# Allegro board core.brd
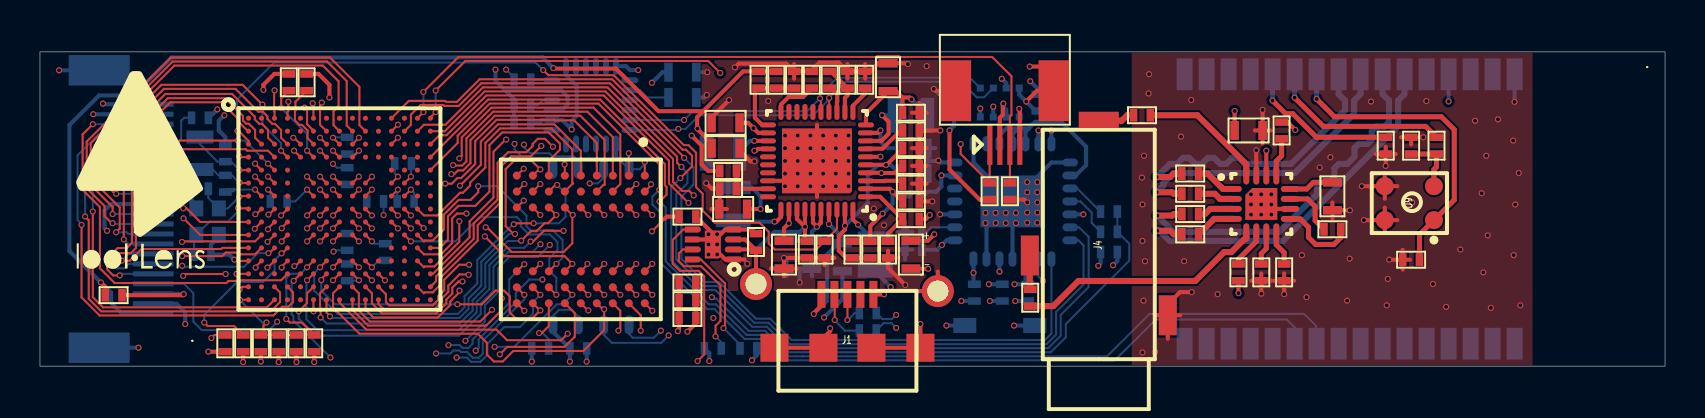
[diagram p0: board, top side]
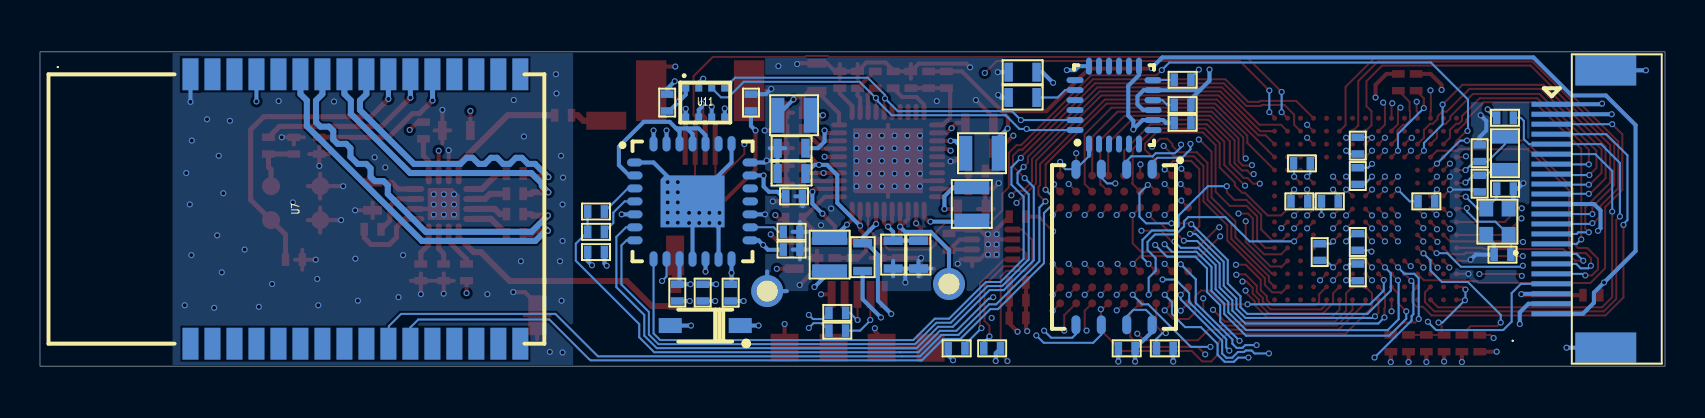
[diagram p1: board, bottom side, seen from below]

Outline 81.28 x 15.75 mm; copper layers: TOP, GND, SIG1, SIG2, POWER, BOTTOM. Coordinates in mm from the lower left corner of the outline.
Outline path: 0,15.75 81.28,15.75 81.28,0 0,0 0,15.75

## Design rules (mm)
net group 2.5V: nets N93770 N94238
net group INL+: nets INL+ N234325
net group INL-: nets INL- N234317
net group INR+: nets INR+ N234321
net group INR-: nets INR- N234313
net group MICP: nets MICP N234231
net group N108220: nets N108220 N209430
net group N108232: nets N108232 N209434
net group N233329: nets N233329 N237100
net group N234021: nets N234021 N234029
net group N234184: nets N76608 N234184
net group OSC32-IN: nets OSC32-IN OSC32-OUT
net group OUTL: nets N2332311 OUTL
net group OUTR: nets N2332490 OUTR
net group 5V: nets N92103
net group POWER: nets N87122
net group RAM_CTL: nets N192988 N192990 N192992 N192994 N192996 N192998 N193000 N193002 N193004

## Placement (name value [footprint] x y rotation side)
C1  1uF  [0402]  12.83 1.14 90 top
C2  0.1uF  [0402]  11.94 1.14 90 top
C3  20pF  [0402]  8.13 5.59 0 bottom
C4  20pF  [0402]  8 8.89 180 bottom
C5  12pF  [0402]  9.27 9.14 90 bottom
C6  12pF  [0402]  9.27 10.67 90 bottom
C7  0.1uF  [0402]  18.16 10.16 0 bottom
C8  0.1uF  [0402]  17.27 5.71 270 bottom
C9  0.1uF  [0402]  18.29 8.26 0 bottom
C10  0.1uF  [0402]  15.37 11.05 90 bottom
C11  0.1uF  [0402]  15.37 4.7 270 bottom
C12  0.1uF  [0402]  11.94 8.26 180 bottom
C13  0.1uF  [0402]  15.37 6.22 270 bottom
C14  0.1uF  [0402]  16.76 8.26 0 bottom
C15  4.7uF  [0603]  32.13 13.46 0 bottom
C16  0.1uF  [0402]  24.13 12.19 0 bottom
C17  4.7uF  [0603]  32.13 14.73 0 bottom
C18  0.1uF  [0402]  24.13 13.08 0 bottom
C19  4.7uF  [0603]  38.61 5.59 270 bottom
C20  4.7pF  [0402]  40.64 5.84 270 top
C21  4.7uF  [0603]  43.69 9.65 180 bottom
C22  4.7uF  [0603]  37.21 5.59 270 top
C23  4.7uF  [0603]  34.67 7.87 0 top
C24  4.7uF  [0603]  34.29 12.19 180 top
C25  0.1uF  [0402]  38.61 14.35 270 top
C26  33pF  [0402]  36.83 14.35 90 top
C27  4.7uF  [0603]  34.29 10.92 180 top
C28  1uF  [0402]  43.56 10.92 180 top
C29  4.7uF  [0603]  43.69 10.92 0 bottom
C30  4.7uF  [0603]  42.42 14.48 270 top
C31  2.2uF  [0603]  40.13 5.46 270 bottom
C32  4.7uF  [0603]  37.34 5.59 270 bottom
C33  1uF  [0402]  38.35 5.84 90 top
C34  0.1uF  [0402]  39.24 5.84 270 top
C35  1uF  [0402]  43.56 9.14 0 top
C36  0.1uF  [0402]  35.81 6.22 90 top
C37  0.1uF  [0402]  42.42 5.84 90 top
C38  0.1uF  [0402]  43.56 11.81 180 top
C39  0.1uF  [0402]  26.92 0.89 180 bottom
C40  0.1uF  [0402]  32.38 7.49 180 top
C41  0.1uF  [0402]  32.38 3.3 180 top
C42  0.1uF  [0402]  32.38 2.41 180 top
C43  0.1uF  [0402]  32.38 4.19 180 top
C46  0.1uF  [0402]  15.37 9.53 90 bottom
C47  2.2uF  [0603]  60.45 11.81 0 top
C48  470nF  [0402]  57.53 9.65 0 top
C49  2.2uF  [0603]  64.64 8.51 90 top
C50  470nF  [0402]  57.53 8.64 0 top
C51  470nF  [0402]  57.53 7.62 0 top
C52  470nF  [0402]  57.53 6.6 0 top
C53  1uF  [0402]  64.64 6.86 180 top
C54  470nF  [0402]  69.85 11.05 270 top
C55  0.1uF  [0402]  68.58 5.33 180 top
C56  470nF  [0402]  67.31 11.05 270 top
C57  1uF  [0402]  62.23 4.7 270 top
C58  1uF  [0402]  43.69 6.73 180 bottom
C59  1uF  [0402]  49.91 13.21 90 bottom
C60  0.1uF  [0402]  45.72 13.21 270 bottom
C61  1uF  [0402]  46.74 3.68 90 bottom
C62  10nF  [0402]  43.56 8.51 0 bottom
C63  1uF  [0402]  53.47 5.71 180 bottom
C64  10nF  [0402]  49.4 3.68 90 bottom
C65  1uF  [0402]  48.13 3.68 90 bottom
C66  10nF  [0402]  43.69 5.84 0 bottom
D1  LED  [0603]  43.56 5.59 90 top
D2  CMMSH1-40  [SOD123]  48.01 2.03 0 bottom
F1  -  [FPC-22]  5.66 13.12 270 bottom
F2  -  [FPC-4]  47.51 11.1 0 top
J1  -  [MICRO-USB]  40.39 0.92 0 top
J4  PHONEJACK STEREO  [PHONEJACK-3P]  52.96 0.35 90 top
J5  HEADER 1  [H-1]  35.81 4.11 0 top
J6  HEADER 1  [H-1]  44.91 3.76 0 top
L1  100nH  [0402]  11.05 1.14 90 top
L2  2.2uH  [0806]  41.78 5.59 270 bottom
L3  2.2uH  [0806]  34.67 8.13 90 bottom
L4  2.2uH  [0806]  34.16 10.67 180 bottom
L5  2.2uH  [0806]  43.56 12.57 0 bottom
M1  MTG  [MTG-100]  7.62 1.27 0 top
M2  MTG  [MTG-100]  80.39 14.99 0 top
NOREF  -  []  1.28 4.29 0 top
NOREF#2  -  []  0 0 0 top
NOREF#3  -  []  0 0 90 top
O1  25M  [OSC-2016]  8.38 7.24 0 bottom
O2  32.768K  [OSC-2012]  8 10.67 90 bottom
R1  10K  [0402]  35.43 0.89 180 bottom
R2  10K  [0402]  33.66 0.89 0 bottom
R3  10K  [0402]  12.45 14.22 270 top
R4  10K  [0402]  13.72 1.14 90 top
R5  10K  [0402]  13.34 14.22 270 top
R6  10K  [0402]  9.27 1.14 270 top
R7  10K  [0402]  10.16 1.14 90 top
R8  10K  [0402]  47.5 8.76 270 top
R9  10K  [0402]  48.51 8.76 270 top
R10  1K  [0402]  24.13 14.35 180 bottom
R11  160K  [0402]  41.53 5.84 270 top
R12  30K  [0402]  43.56 8.26 0 top
R13  470K  [0402]  34.42 9.78 180 top
R14  150K  [0402]  34.42 8.89 180 top
R15  470K  [0402]  35.94 14.35 90 top
R16  220K  [0402]  37.72 14.35 90 top
R17  22  [0402]  41.4 1.78 0 bottom
R18  22  [0402]  41.4 2.67 0 bottom
R19  10  [0402]  43.56 10.03 180 top
R20  220K  [0402]  43.56 12.7 0 top
R22  1.5K  [0402]  41.27 14.35 270 top
R23  100K  [0402]  40.39 14.35 90 top
R24  100K  [0402]  39.5 14.35 90 top
R25  10K  [0402]  43.56 7.37 0 top
R26  10K  [0402]  8 12.45 0 bottom
R27  10K  [0402]  3.68 3.56 180 top
R28  10K  [0402]  25.02 0.89 0 bottom
R29  10K  [0402]  62.1 11.81 270 top
R30  16  [0402]  49.53 3.43 90 top
R31  16  [0402]  55.12 12.57 180 top
R32  3.3K  [0402]  68.58 11.05 90 top
R33  10K  [0402]  59.94 4.7 270 top
R34  10K  [0402]  61.09 4.7 270 top
R35  0  [0402]  53.47 7.75 180 bottom
R36  NC  [0402]  53.47 6.73 180 bottom
U1  STM32F429  [STM32F429-UFBGA176]  14.98 7.87 0 top
U2  MPU6050  [MPU6050-QFN]  27.56 13.08 90 bottom
U3  RT5002  [RT5002-QFN40]  38.86 10.29 180 top
U4  MAX17048  [MAX17048-TDFN8]  33.66 6.1 180 top
U5  MT48LC8M16A2  [MT48LC8M16A2-VFBGA54]  27.05 6.35 270 top
U6  W25Q256  [W25Q256-SON]  27.56 5.97 270 bottom
U7  -  [BK8000L-MODULE]  56.05 1.12 90 bottom
U8  TPA6132A2  [TPA6132A2-QFN]  61.09 8.13 0 top
U9  -  [SPU0410HR5H-PB]  69.72 9.02 270 top
U10  ADBS-A320  [ADBS-A320-QFN]  48.64 8.26 180 bottom
U11  BMP280  [BMP280-LGA8]  48.01 13.21 90 bottom

## Library data of the parts
C1 C28 C33 C35 C53 C57-C59 C61 C63 C65 = Cap: signal model: DEFAULT_CAPACITOR_1e+06pF_2_1
C2 C7-C14 C16 C18 C25 C34 C36-C43 C46 C55 C60 = Cap: signal model: DEFAULT_CAPACITOR_100000pF_2_1
C3 C4 = Cap: signal model: DEFAULT_CAPACITOR_20.000000pF_2_1
C5 C6 = Cap: signal model: DEFAULT_CAPACITOR_12.000000pF_2_1
C15 C17 C19 C21-C24 C27 C29 C30 C32 = Cap: signal model: DEFAULT_CAPACITOR_4.7e+06pF_2_1
C20 = Cap: signal model: DEFAULT_CAPACITOR_4.700000pF_2_1
C26 = Cap: signal model: DEFAULT_CAPACITOR_33.000000pF_2_1
C31 C47 C49 = Cap: signal model: DEFAULT_CAPACITOR_2.2e+06pF_2_1
C48 C50-C52 C54 C56 = Cap: signal model: DEFAULT_CAPACITOR_470000pF_2_1
C62 C64 C66 = Cap: signal model: DEFAULT_CAPACITOR_10000pF_2_1
D1 = LED
D2 = 1n5819
F1 = FPC-22
F2 = FPC-4
J1 = MICRO-USB
J4 = PHONEJACK STEREO
J5 J6 = HEADER 1
L1 = Inductor: signal model: DEFAULT_INDUCTOR_100.000000nH_2_1
L2-L5 = Inductor: signal model: DEFAULT_INDUCTOR_2200nH_2_1
M1 M2 = MTG
O1 = OSC-N
O2 = OSC-CLK: signal model: DEFAULT_RESISTOR_32768OHM_2_1
R1-R9 R25-R29 R33 R34 = Res: signal model: DEFAULT_RESISTOR_10000OHM_2_1
R10 = Res: signal model: DEFAULT_RESISTOR_1000.000000OHM_2_1
R11 = Res: signal model: DEFAULT_RESISTOR_160000OHM_2_1
R12 = Res: signal model: DEFAULT_RESISTOR_30000OHM_2_1
R13 R15 = Res: signal model: DEFAULT_RESISTOR_470000OHM_2_1
R14 = Res: signal model: DEFAULT_RESISTOR_150000OHM_2_1
R16 R20 = Res: signal model: DEFAULT_RESISTOR_220000OHM_2_1
R17 R18 = Res: signal model: DEFAULT_RESISTOR_22.000000OHM_2_1
R19 = Res: signal model: DEFAULT_RESISTOR_10.000000OHM_2_1
R22 = Res: signal model: DEFAULT_RESISTOR_1500OHM_2_1
R23 R24 = Res: signal model: DEFAULT_RESISTOR_100000OHM_2_1
R30 R31 = Res: signal model: DEFAULT_RESISTOR_16.000000OHM_2_1
R32 = Res: signal model: DEFAULT_RESISTOR_3300OHM_2_1
R35 = Res: signal model: DEFAULT_RESISTOR_0.001OHM_2_1
R36 = Res
U1 = STM32F429
U2 = MPU6050
U3 = RT5002
U4 = MAX17048
U5 = MT48LC8M16A2
U6 = W25Q256
U7 = BK8000L-MODULE
U8 = TPA6132A2
U9 = SPU0410HR5H-PB
U10 = ADBS-A320_1
U11 = BMP280_0

## Footprints (pads in the part's own frame, mm; a bottom-side part is the same pattern mirrored in y, then rotated)
0402
  rect 0.375x0.64 smd: 1(-0.42,0) 2(0.42,0)
0603
  rect 0.425x0.95 smd: 1(-0.7,0) 2(0.7,0)
0806
  rect 0.675x1.75 smd: 1(-0.825,0) 2(0.825,0)
ADBS-A320-QFN
  oval 0.775x0.4 smd: 1(-2.887,1.95) 2(-2.887,1.3) 3(-2.887,0.65) 4(-2.887,0) 5(-2.887,-0.65) 6(-2.887,-1.3) 7(-2.887,-1.95) 15(2.887,-1.95) 16(2.887,-1.3) 17(2.887,-0.65) 18(2.887,0) 19(2.887,0.65) 20(2.887,1.3) 21(2.887,1.95)
  oval 0.4x0.775 smd: 8(-1.95,-2.887) 9(-1.3,-2.887) 10(-0.65,-2.887) 11(0,-2.887) 12(0.65,-2.887) 13(1.3,-2.887) 14(1.95,-2.887) 22(1.95,2.887) 23(1.3,2.887) 24(0.65,2.887) 25(0,2.887) 26(-0.65,2.887) 27(-1.3,2.887) 28(-1.95,2.887)
  custom 3.2x2.6 smd: 29(0,0)
BK8000L-MODULE
  rect 1.6x0.8 smd: 1(0,17.7) 2(0,16.6) 3(0,15.5) 4(0,14.4) 5(0,13.3) 6(0,12.2) 7(0,11.1) 8(0,10) 9(0,8.9) 10(0,7.8) 11(0,6.7) 12(0,5.6) 13(0,4.5) 14(0,3.4) 15(0,2.3) 16(0,1.2) 17(13.5,1.2) 18(13.5,2.3) 19(13.5,3.4) 20(13.5,4.5) 21(13.5,5.6) 22(13.5,6.7) 23(13.5,7.8) 24(13.5,8.9) 25(13.5,10) 26(13.5,11.1) 27(13.5,12.2) 28(13.5,13.3) 29(13.5,14.4) 30(13.5,15.5) 31(13.5,16.6) 32(13.5,17.7)
BMP280-LGA8
  rect 0.35x0.35 smd: 1(0.725,0.975) 2(0.725,0.325) 3(0.725,-0.325) 4(0.725,-0.975) 5(-0.725,-0.975) 6(-0.725,-0.325) 7(-0.725,0.325) 8(-0.725,0.975)
FPC-4
  rect 0.254x2.032 smd: 1(0,0) 2(0.5,0) 3(1,0) 4(1.5,0)
  rect 1.524x3.048 smd: 5(-1.7,2.7) 6(3.2,2.7)
FPC-22
  rect 0.254x2.032 smd: 1(0,0) 2(0.5,0) 3(1,0) 4(1.5,0) 5(2,0) 6(2.5,0) 7(3,0) 8(3.5,0) 9(4,0) 10(4.5,0) 11(5,0) 12(5.5,0) 13(6,0) 14(6.5,0) 15(7,0) 16(7.5,0) 17(8,0) 18(8.5,0) 19(9,0) 20(9.5,0) 21(10,0) 22(10.5,0)
  rect 1.524x3.048 smd: 23(-1.7,2.7) 24(12.2,2.7)
H-1
  round 1.6 hole 1.05: 1(0,0)
MAX17048-TDFN8
  custom 0.8x0.3 smd: 1(-1,0.75) 2(-1,0.25) 3(-1,-0.25) 4(-1,-0.75) 5(1,-0.75) 6(1,-0.25) 7(1,0.25) 8(1,0.75)
  custom 0.8x1.4 smd: 9(0,0)
MICRO-USB
  round 0.01 hole 0.5 unplated: (-2,2.15) (2,2.15)
  rect 0.4x1.35 smd: 1(-1.3,2.675) 2(-0.65,2.675) 3(0,2.675) 4(0.65,2.675) 5(1.3,2.675)
  rect 1.4x1.4 smd: 6(-3.65,0) 7(-1.2,0) 8(1.2,0) 9(3.65,0)
MPU6050-QFN
  oval 0.85x0.3 smd: 1(-1.95,1.25) 2(-1.95,0.75) 3(-1.95,0.25) 4(-1.95,-0.25) 5(-1.95,-0.75) 6(-1.95,-1.25) 13(1.95,-1.25) 14(1.95,-0.75) 15(1.95,-0.25) 16(1.95,0.25) 17(1.95,0.75) 18(1.95,1.25)
  oval 0.3x0.85 smd: 7(-1.25,-1.95) 8(-0.75,-1.95) 9(-0.25,-1.95) 10(0.25,-1.95) 11(0.75,-1.95) 12(1.25,-1.95) 19(1.25,1.95) 20(0.75,1.95) 21(0.25,1.95) 22(-0.25,1.95) 23(-0.75,1.95) 24(-1.25,1.95)
MT48LC8M16A2-VFBGA54
  round 0.4 smd: A1(-3.2,3.2) A2(-2.4,3.2) A3(-1.6,3.2) A7(1.6,3.2) A8(2.4,3.2) A9(3.2,3.2) B1(-3.2,2.4) B2(-2.4,2.4) B3(-1.6,2.4) B7(1.6,2.4) B8(2.4,2.4) B9(3.2,2.4) C1(-3.2,1.6) C2(-2.4,1.6) C3(-1.6,1.6) C7(1.6,1.6) C8(2.4,1.6) C9(3.2,1.6) D1(-3.2,0.8) D2(-2.4,0.8) D3(-1.6,0.8) D7(1.6,0.8) D8(2.4,0.8) D9(3.2,0.8) E1(-3.2,0) E2(-2.4,0) E3(-1.6,0) E7(1.6,0) E8(2.4,0) E9(3.2,0) F1(-3.2,-0.8) F2(-2.4,-0.8) F3(-1.6,-0.8) F7(1.6,-0.8) F8(2.4,-0.8) F9(3.2,-0.8) G1(-3.2,-1.6) G2(-2.4,-1.6) G3(-1.6,-1.6) G7(1.6,-1.6) G8(2.4,-1.6) G9(3.2,-1.6) H1(-3.2,-2.4) H2(-2.4,-2.4) H3(-1.6,-2.4) H7(1.6,-2.4) H8(2.4,-2.4) H9(3.2,-2.4) J1(-3.2,-3.2) J2(-2.4,-3.2) J3(-1.6,-3.2) J7(1.6,-3.2) J8(2.4,-3.2) J9(3.2,-3.2)
MTG-100
  round 0.1 hole 1 unplated: (0,0)
OSC-2012
  rect 0.65x1.35 smd: 1(-0.812,0) 2(0.812,0)
OSC-2016
  rect 0.7x0.8 smd: 1(-0.563,0.663) 2(-0.563,-0.663) 3(0.563,-0.663) 4(0.563,0.663)
PHONEJACK-3P
  round 0.01 hole 1.4 unplated: (1.7,0) (8.7,0)
  rect 2x0.9 smd: 1(5.2,3.45) 3(2.2,-3.45)
  rect 0.9x2 smd: 2(11.95,0)
RT5002-QFN40
  oval 0.8x0.25 smd: 1(-2.45,1.8) 2(-2.45,1.4) 3(-2.45,1) 4(-2.45,0.6) 5(-2.45,0.2) 6(-2.45,-0.2) 7(-2.45,-0.6) 8(-2.45,-1) 9(-2.45,-1.4) 10(-2.45,-1.8) 21(2.45,-1.8) 22(2.45,-1.4) 23(2.45,-1) 24(2.45,-0.6) 25(2.45,-0.2) 26(2.45,0.2) 27(2.45,0.6) 28(2.45,1) 29(2.45,1.4) 30(2.45,1.8)
  oval 0.25x0.8 smd: 11(-1.8,-2.45) 12(-1.4,-2.45) 13(-1,-2.45) 14(-0.6,-2.45) 15(-0.2,-2.45) 16(0.2,-2.45) 17(0.6,-2.45) 18(1,-2.45) 19(1.4,-2.45) 20(1.8,-2.45) 31(1.8,2.45) 32(1.4,2.45) 33(1,2.45) 34(0.6,2.45) 35(0.2,2.45) 36(-0.2,2.45) 37(-0.6,2.45) 38(-1,2.45) 39(-1.4,2.45) 40(-1.8,2.45)
  custom 3.5x3.25 smd: 41(0,0)
SOD123
  rect 1.15x0.75 smd: 1(-1.75,0) 2(1.75,0)
SPU0410HR5H-PB
  round 0.9 smd: 1(1.7,0) 2(1.7,-2.46) 3(0,-2.46) 4(0,0)
STM32F429-UFBGA176
  round 0.25 smd: A1(-4.55,4.55) A2(-3.9,4.55) A3(-3.25,4.55) A4(-2.6,4.55) A5(-1.95,4.55) A6(-1.3,4.55) A7(-0.65,4.55) A8(0,4.55) A9(0.65,4.55) A10(1.3,4.55) A11(1.95,4.55) A12(2.6,4.55) A13(3.25,4.55) A14(3.9,4.55) A15(4.55,4.55) B1(-4.55,3.9) B2(-3.9,3.9) B3(-3.25,3.9) B4(-2.6,3.9) B5(-1.95,3.9) B6(-1.3,3.9) B7(-0.65,3.9) B8(0,3.9) B9(0.65,3.9) B10(1.3,3.9) B11(1.95,3.9) B12(2.6,3.9) B13(3.25,3.9) B14(3.9,3.9) B15(4.55,3.9) C1(-4.55,3.25) C2(-3.9,3.25) C3(-3.25,3.25) C4(-2.6,3.25) C5(-1.95,3.25) C6(-1.3,3.25) C7(-0.65,3.25) C8(0,3.25) C9(0.65,3.25) C10(1.3,3.25) C11(1.95,3.25) C12(2.6,3.25) C13(3.25,3.25) C14(3.9,3.25) C15(4.55,3.25) D1(-4.55,2.6) D2(-3.9,2.6) D3(-3.25,2.6) D4(-2.6,2.6) D5(-1.95,2.6) D6(-1.3,2.6) D7(-0.65,2.6) D8(0,2.6) D9(0.65,2.6) D10(1.3,2.6) D11(1.95,2.6) D12(2.6,2.6) D13(3.25,2.6) D14(3.9,2.6) D15(4.55,2.6) E1(-4.55,1.95) E2(-3.9,1.95) E3(-3.25,1.95) E4(-2.6,1.95) E12(2.6,1.95) E13(3.25,1.95) E14(3.9,1.95) E15(4.55,1.95) F1(-4.55,1.3) F2(-3.9,1.3) F3(-3.25,1.3) F4(-2.6,1.3) F6(-1.3,1.3) F7(-0.65,1.3) F8(0,1.3) F9(0.65,1.3) F10(1.3,1.3) F12(2.6,1.3) F13(3.25,1.3) F14(3.9,1.3) F15(4.55,1.3) G1(-4.55,0.65) G2(-3.9,0.65) G3(-3.25,0.65) G4(-2.6,0.65) G6(-1.3,0.65) G7(-0.65,0.65) G8(0,0.65) G9(0.65,0.65) G10(1.3,0.65) G12(2.6,0.65) G13(3.25,0.65) G14(3.9,0.65) G15(4.55,0.65) H1(-4.55,0) H2(-3.9,0) H3(-3.25,0) H4(-2.6,0) H6(-1.3,0) H7(-0.65,0) H8(0,0) H9(0.65,0) H10(1.3,0) H12(2.6,0) H13(3.25,0) H14(3.9,0) H15(4.55,0) J1(-4.55,-0.65) J2(-3.9,-0.65) J3(-3.25,-0.65) J4(-2.6,-0.65) J6(-1.3,-0.65) J7(-0.65,-0.65) J8(0,-0.65) J9(0.65,-0.65) J10(1.3,-0.65) J12(2.6,-0.65) J13(3.25,-0.65) J14(3.9,-0.65) J15(4.55,-0.65) K1(-4.55,-1.3) K2(-3.9,-1.3) K3(-3.25,-1.3) K4(-2.6,-1.3) K6(-1.3,-1.3) K7(-0.65,-1.3) K8(0,-1.3) K9(0.65,-1.3) K10(1.3,-1.3) K12(2.6,-1.3) K13(3.25,-1.3) K14(3.9,-1.3) K15(4.55,-1.3) L1(-4.55,-1.95) L2(-3.9,-1.95) L3(-3.25,-1.95) L4(-2.6,-1.95) L12(2.6,-1.95) L13(3.25,-1.95) L14(3.9,-1.95) L15(4.55,-1.95) M1(-4.55,-2.6) M2(-3.9,-2.6) M3(-3.25,-2.6) M4(-2.6,-2.6) M5(-1.95,-2.6) M6(-1.3,-2.6) M7(-0.65,-2.6) M8(0,-2.6) M9(0.65,-2.6) M10(1.3,-2.6) M11(1.95,-2.6) M12(2.6,-2.6) M13(3.25,-2.6) M14(3.9,-2.6) M15(4.55,-2.6) N1(-4.55,-3.25) N2(-3.9,-3.25) N3(-3.25,-3.25) N4(-2.6,-3.25) N5(-1.95,-3.25) N6(-1.3,-3.25) N7(-0.65,-3.25) N8(0,-3.25) N9(0.65,-3.25) N10(1.3,-3.25) N11(1.95,-3.25) N12(2.6,-3.25) N13(3.25,-3.25) N14(3.9,-3.25) N15(4.55,-3.25) P1(-4.55,-3.9) P2(-3.9,-3.9) P3(-3.25,-3.9) P4(-2.6,-3.9) P5(-1.95,-3.9) P6(-1.3,-3.9) P7(-0.65,-3.9) P8(0,-3.9) P9(0.65,-3.9) P10(1.3,-3.9) P11(1.95,-3.9) P12(2.6,-3.9) P13(3.25,-3.9) P14(3.9,-3.9) P15(4.55,-3.9) R1(-4.55,-4.55) R2(-3.9,-4.55) R3(-3.25,-4.55) R4(-2.6,-4.55) R5(-1.95,-4.55) R6(-1.3,-4.55) R7(-0.65,-4.55) R8(0,-4.55) R9(0.65,-4.55) R10(1.3,-4.55) R11(1.95,-4.55) R12(2.6,-4.55) R13(3.25,-4.55) R14(3.9,-4.55) R15(4.55,-4.55)
TPA6132A2-QFN
  oval 0.925x0.3 smd: 1(-1.437,0.75) 2(-1.437,0.25) 3(-1.437,-0.25) 4(-1.437,-0.75) 9(1.437,-0.75) 10(1.437,-0.25) 11(1.437,0.25) 12(1.437,0.75)
  oval 0.3x0.925 smd: 5(-0.75,-1.437) 6(-0.25,-1.437) 7(0.25,-1.437) 8(0.75,-1.437) 13(0.75,1.437) 14(0.25,1.437) 15(-0.25,1.437) 16(-0.75,1.437)
  custom 1.6x1.6 smd: 17(0,0)
W25Q256-SON
  oval 0.95x0.45 smd: 1(-3.9,1.905) 2(-3.9,0.635) 3(-3.9,-0.635) 4(-3.9,-1.905) 5(3.9,-1.905) 6(3.9,-0.635) 7(3.9,0.635) 8(3.9,1.905)

## Nets
2.5V: C26.2 C27.2 F1.22 L4.2 R15.2 R27.2
3.3V: C9.2 C10.2 C11.2 C12.2 C13.2 C14.2 C16.2 C17.1 C23.2 C39.2 C40.2 C41.2 C42.2 C43.2 C46.2 C47.1 C59.2 C60.2 D2.2 F2.4 L1.1 L3.2 R1.1 R2.1 R5.1 R6.2 R8.2 R13.2 R25.2 R26.2 R28.1 R29.1 R33.2 U1.C5(VDD1) U1.C7(VDD2) U1.C8(VDD3) U1.C9(VDD4) U1.F3(VDD5) U1.G3(VDD6) U1.G13(VDD7) U1.H13(VDD8) U1.J12(VDD9) U1.J13(VDD10) U1.K4(VDD11) U1.N8(VDD12) U1.N9(VDD13) U1.N10(VDD14) U2.8(VLOGIC) U2.13(VDD) U5.A7(VDDQ1) U5.A9(VDD1) U5.B3(VDDQ2) U5.C7(VDDQ3) U5.D3(VDDQ4) U5.E7(VDD2) U5.J9(VDD3) U6.3(W\P\) U6.7(R\S\T\) U6.8(VCC) U7.29(VBAT) U8.14(VDD) U11.2(CSB) U11.6(VDDIO) U11.8(VDD)
3V: C61.2 C62.2 C63.2 C64.2 C65.2 C66.2 D2.1 U10.5(VDDIO1) U10.10(NRST) U10.12(ORIENT) U10.14(VDDIO2) U10.15(IO_SELECT) U10.20(VDDA) U10.27(LED+)
5V: C20.2 C21.2 C28.2 F1.1 F1.11 R11.2 U3.5(PVD7) U3.39(PVD1)
GND: C1.1 C2.1 C3.2 C4.2 C5.1 C6.2 C7.1 C8.1 C9.1 C10.1 C11.1 C12.1 C13.1 C14.1 C15.2 C16.1 C17.2 C18.1 C19.2 C21.1 C22.2 C23.1 C24.2 C25.1 C27.1 C28.1 C29.2 C30.1 C31.2 C32.2 C33.1 C34.2 C35.2 C36.2 C37.1 C38.1 C39.1 C40.1 C41.1 C42.1 C43.1 C46.1 C47.2 C49.1 C55.2 C56.2 C57.2 C58.2 C59.1 C60.1 C61.1 C62.1 C63.1 C64.1 C65.1 C66.1 F1.2 F1.21 F1.23 F1.24 F2.2 F2.5 F2.6 J1.5(GND) J1.6(SH1) J1.7(SH2) J1.8(SH3) J1.9(SH4) J4.3(C) J6.1 O1.2(GND1) O1.4(GND2) R3.1 R4.1 R7.1 R9.2 R12.2 R14.2 R16.2 R19.1 R20.2 R22.1 R23.2 R32.2 R34.2 U1.D5(VSS1) U1.D7(VSS2) U1.D8(VSS3) U1.D9(VSS4) U1.F2(VSS5) U1.F6(VSS6) U1.F7(VSS7) U1.F8(VSS8) U1.F9(VSS9) U1.F10(VSS10) U1.F12(VSS11) U1.G2(VSS12) U1.G6(VSS13) U1.G7(VSS14) U1.G8(VSS15) U1.G9(VSS16) U1.G10(VSS17) U1.G12(VSS18) U1.H6(VSS19) U1.H7(VSS20) U1.H8(VSS21) U1.H9(VSS22) U1.H10(VSS23) U1.H12(VSS24) U1.J6(VSS25) U1.J7(VSS26) U1.J8(VSS27) U1.J9(VSS28) U1.J10(VSS29) U1.K6(VSS30) U1.K7(VSS31) U1.K8(VSS32) U1.K9(VSS33) U1.K10(VSS34) U1.M1(VSSA) U1.M8(VSS35) U1.M9(VSS36) U1.N1(VREF-) U2.1(CLKIN) U2.9(AO0) U2.11(FSYNC) U2.18(GND) U3.28(TSSEL) U3.41(GND) U4.1(CTG) U4.4(GND) U4.6(QSTRT) U4.9(GND-PAD) U5.A1(VSS1) U5.A3(VSSQ1) U5.B7(VSSQ2) U5.C3(VSSQ3) U5.D7(VSSQ4) U5.E3(VSS2) U5.J1(VSS3) U6.4(GND) U7.32(GND5) U8.10(PGND) U8.15(SGND) U8.17(GND-PAD) U9.2(GND1) U9.3(GND2) U10.1(GND1) U10.11(GND2) U10.13(SHTDWN) U10.17(NDREG_EN) U10.21(GND3) U10.22(GND4) U10.28(GND5) U10.29(GNP-PAD) U11.1(GND1) U11.5(SDO) U11.7(GND2)
VBAT: C33.2 C36.1 J5.1 U3.33(BAT2) U3.34(BAT1) U4.2(CELL) U4.3(VDD)
VDDA: C1.2 C2.2 L1.2 U1.P1(VREF+) U1.R1(VDDA)
BOOT0: R3.2 U1.D6(BOOT0)
BOOT1: R4.2 U1.M6(PB2(BOOT1))
BYPASS: R7.2 U1.L4(BYPASS_REG)
FMC_A0: U1.E2(PF0) U5.H7(A0)
FMC_A1: U1.H3(PF1) U5.H8(A1)
FMC_A2: U1.H2(PF2) U5.J8(A2)
FMC_A3: U1.J2(PF3) U5.J7(A3)
FMC_A4: U1.J3(PF4) U5.J3(A4)
FMC_A5: U1.K3(PF5) U5.J2(A5)
FMC_A6: U1.P6(PF12) U5.H3(A6)
FMC_A7: U1.N6(PF13) U5.H2(A7)
FMC_A8: U1.R7(PF14) U5.H1(A8)
FMC_A9: U1.P7(PF15) U5.G3(A9)
FMC_A10: U1.N7(PG0) U5.H9(A10)
FMC_A11: U1.M7(PG1) U5.G2(A11)
FMC_A12: U1.L15(PG2) U5.G1(NC/A12)
FMC_D0: U1.M14(PD14) U5.A8(DQ0)
FMC_D1: U1.L14(PD15) U5.B9(DQ1)
FMC_D2: U1.B12(PD0) U5.B8(DQ2)
FMC_D3: U1.C12(PD1) U5.C9(DQ3)
FMC_D4: U1.R8(PE7) U5.C8(DQ4)
FMC_D5: U1.P8(PE8) U5.D9(DQ5)
FMC_D6: U1.P9(PE9) U5.D8(DQ6)
FMC_D7: U1.R9(PE10) U5.E9(DQ7)
FMC_D8: U1.P10(PE11) U5.E1(DQ8)
FMC_D9: U1.R10(PE12) U5.D2(DQ9)
FMC_D10: U1.N11(PE13) U5.D1(DQ10)
FMC_D11: U1.P11(PE14) U5.C2(DQ11)
FMC_D12: U1.R11(PE15) U5.C1(DQ12)
FMC_D13: U1.P15(PD8) U5.B2(DQ13)
FMC_D14: U1.P14(PD9) U5.B1(DQ14)
FMC_D15: U1.N15(PD10) U5.A2(DQ15)
HE_ADC: U1.M3(PC1)
INL+: C50.1 U7.25(AUDIO_LP)
INL-: C48.1 U7.24(AUDIO_LN)
INR+: C51.1 U7.26(AUDIO_RP)
INR-: C52.1 U7.27(AUDIO_RN)
LCD_B0: F1.15 U1.B1(PE4)
LCD_B1: F1.14 U1.B8(PG12)
LCD_B2: F1.13 U1.B10(PG10)
LCD_B3: F1.12 U1.B9(PG11)
LCD_B4: F1.10 U1.D4(PI4)
LCD_B5: F1.9 U1.C4(PI5)
LCD_B6: F1.8 U1.C3(PI6)
LCD_B7: F1.7 U1.C2(PI7)
LED-: U10.2(XY-LED) U10.24(LED1-) U10.25(LED2-) U10.26(LED3-)
MIC_BIAS: C55.1 U7.23(VMIC) U9.1(VDD)
MICN: C56.1 U7.21(MICN)
MICP: C54.1 U7.22(MICP)
OSC32-IN: C6.1 O2.2(X2) U1.E1(PC14(OSC32_IN))
OSC32-OUT: C5.2 O2.1(X1) U1.F1(PC15(OSC32_OUT))
OSC-IN: C4.1 O1.3(X2) U1.G1(PH0(OSC_IN))
OSC-OUT: C3.1 O1.1(X1) U1.H1(PH1(OSC_OUT)
OUTL: R31.1 U8.16(OUTL)
OUTR: R30.1 U8.5(OUTR)
PDR_ON: R5.2 U1.C6(PDR_ON)
RESET: R6.1 U1.J1(NRST)
SYS: C19.1 C22.1 C24.1 C29.1 C32.1 L2.2 U3.9(PVD4) U3.22(PVD3) U3.24(EN1234) U3.32(PVD2) U3.35(SYS2) U3.36(SYS1)
VCAP_1: C8.2 U1.M10(VCAP_1)
VCAP_2: C7.2 U1.F13(VCAP_2)
VCHG: C31.1 J1.1(VBUS) U3.37(VIN)
VRTC: C34.1 U1.C1(VBAT) U3.38(RTCPWR)
N58225: F1.20 R27.1
N76608: R10.1 U2.12(INT)
N76702: C18.2 U2.10(REGOUT)
N76822: C15.1 U2.20(CPOUT)
N84564: C25.2 U3.20(VREF)
N85062: D1.2(ANODE) U3.6(LX7)
N85526: D1.1(CATHODE) R19.2 U3.4(FB7)
N85983: R22.2 U3.11(ISETA)
N86193: R24.1 U3.13(VP)
N86197: R23.1 R24.2 U3.12(TS)
N86348: C37.2 R25.1 U3.1(I\N\T\)
N86681: C38.2 U3.7(BATS)
N87122: L2.1 U3.40(LX1)
N92103: C20.1 R11.1 R12.1 U3.2(FB1)
N92575: L3.1 U3.31(LX2)
N92645: R13.1 R14.1 U3.29(FB2)
N93770: C26.1 R15.1 R16.1 U3.21(FB3)
N94238: L4.1 U3.23(LX3)
N94612: C30.2 L5.2 R20.1 U3.10(FB4)
N94775: L5.1 U3.8(LX4)
N95538: C35.1 U3.3(VDDM)
N108220: J1.2(D-) R17.1
N108232: J1.3(D+) R18.1
N192986: R28.2 U1.B6(PB6) U5.G9(C\S\)
N192988: U1.M2(PC0) U5.F9(W\E\)
N192990: U1.B7(PG15) U5.F7(C\A\S\)
N192992: U1.R6(PF11) U5.F8(R\A\S\)
N192994: U1.A6(PB5) U5.F3(CKE)
N192996: U1.H14(PG8) U5.F2(CLK)
N192998: U1.A4(PE0) U5.E8(DQML)
N193000: U1.A3(PE1) U5.F1(DQMH)
N193002: U1.K14(PG4) U5.G7(BA0)
N193004: U1.K13(PG5) U5.G8(BA1)
N193010: U1.K1(PF7) U6.6(CLK)
N206144: U1.K2(PF6) U6.1(C\S\)
N206148: U1.L3(PF8) U6.2(DO)
N206152: U1.L2(PF9) U6.5(DI)
N209400: R1.2 U1.J4(PH5) U2.24(SDA) U3.14(SDA) U4.8(SDA) U11.3(SDI)
N209412: R2.2 U1.H4(PH4) U2.23(SCL) U3.15(SCL) U4.7(SCL) U11.4(SCK)
N209430: R17.2 U1.C15(PA11)
N209434: R18.2 U1.B15(PA12)
N209526: F1.19 U1.J14(PG7)
N209530: F1.17 U1.D3(PI9)
N209550: F1.18 U1.E3(PI10)
N209554: F1.16 U1.L1(PF10)
N209574: F1.3 U1.N4(PA4)
N209578: F1.4 U1.P4(PA5)
N209598: F1.5 R26.1 U1.P3(PA6)
N209602: F1.6 U1.R3(PA7)
N219356: U1.N5(PC4) U4.5(A\L\R\T\)
N226210: F2.1 R8.1 U1.A15(PA13(TMS))
N226214: F2.3 R9.1 U1.A14(PA14(TCK))
N232777: C58.1 U10.16(DVDD)
N233325: R36.2 U10.4(GPIO)
N233329: R35.2 U10.3(MOTION)
N233931: R34.1 U8.7(G1)
N233947: R33.1 U8.6(G0)
N233963: R29.2 U8.13(EN)
N234001: C49.2 U8.12(HPVDD)
N234021: C53.2 U8.11(CPP)
N234029: C53.1 U8.9(CPN)
N234037: C57.1 U8.8(HPVSS)
N234184: R10.2 U1.M5(PC3)
N234231: C54.2 R32.1 U9.4(OUT)
N234313: C52.2 U8.4(INR-)
N234317: C48.2 U8.1(INL-)
N234321: C51.2 U8.3(INR+)
N234325: C50.2 U8.2(INL+)
N237076: U1.E15(PA9) U7.11(RX)
N237080: U1.D15(PA10) U7.10(TX)
N237084: U1.D1(PC13) U10.9(NCS)
N237088: U1.B14(PC10) U10.7(SCK)
N237092: U1.B13(PC11) U10.8(MISO)
N237096: U1.A12(PC12) U10.6(MOSI)
N237100: R35.1 R36.1 U1.M4(PC2)
N2332311: J4.2(B) R31.2
N2332490: J4.1(A) R30.2

Pads without a net: J1 4; U1 A1 A2 A5 A7 A8 A9 A10 A11 A13 B2 B3 B4 B5 B11 C10 C11 C13 C14 D2 D10 D11 D12 D13 D14 E4 E12 E13 E14 F4 F14 F15 G4 G14 G15 H15 J15 K12 K15 L12 L13 M11 M12 M13 M15 N2 N3 N12 N13 N14 P2 P5 P12 P13 R2 R4 R5 R12 R13 R14 R15; U2 2 3 4 5 6 7 14 15 16 17 19 21 22; U3 16 17 18 19 25 26 27 30; U5 E2; U7 1 2 3 4 5 6 7 8 9 12 13 14 15 16 17 18 19 20 28 30 31; U10 18 19 23

## Via types
v1: diameter 0.305, hole 0.203, TOP to BOTTOM, 482 vias

## Routing (per net, layer and track width the routed paths; a pad name or vN(x,y) marks a point on that pad's centre or on a via; arc(x,y) is an arc through that point)
2.5V: length 55.3
  TOP w0.203: 32.87,11.91 32.87,11.89 33.59,11.16 C27.2 ; 32.87,11.91 v1(32.88,11.91) ; 32.87,11.91 32.87,12.47 33.17,12.78 ; 33.17,12.78 35.17,14.77 R15.2 C26.2 ; 33.17,12.78 30.94,12.78 28.8,14.91 25.7,14.91 v1(25.68,14.94) ; v1(3.05,4.19) 3.26,3.98 R27.2
  BOTTOM w0.203: v1(32.88,11.91) 33.34,11.45 L4.2 ; F1.22 4.11,2.62 3.56,3.17 3.56,3.68 v1(3.05,4.19) 1.47,5.77 1.47,12.08 2.96,13.56 4.67,13.56 6.58,15.47 25.15,15.47 v1(25.68,14.94)
3.3V: length 59.9
  TOP w0.102: U1.N9 v1(15.95,4.3) ; U5.A7 v1(30.63,5.12) ; U1.F3 v1(11.41,9.5) ; U1.C8 v1(14.66,11.45) ; v1(27.38,5.12) 27.38,5.08 U5.E7 ; v1(12.67,11.44) 12.71,11.44 U1.C5 ; U5.C7 v1(29.03,5.12) ; U5.B3 v1(29.83,7.58) ; U1.C9 v1(15.95,11.45) ; U1.G13 v1(18.55,8.85) ; U1.J12 v1(17.9,6.9) ; U1.N10 v1(16.6,4.3) ; v1(30.61,6.75) 31.24,7.39 ; U1.C7 v1(14.01,11.45) ; U5.A9 v1(30.63,2.78) ; U1.J13 v1(18.55,6.9) ; U5.D3 v1(28.23,7.58) ; U1.H13 v1(18.55,7.55) ; U1.G3 v1(11.41,8.85) ; U5.J9 v1(24.23,2.78) ; U1.K4 12.09,6.28 v1(12.09,6.25) ; U1.N8 v1(14.66,4.3)
  TOP w0.203: v1(45.49,11.81) 45.49,9.86 47,8.34 R8.2 ; v1(44.5,7.57) 44.3,7.37 R25.2 ; R5.1 13.93,14.64 14.48,14.1 v1(14.48,13.46) ; U8.14 v1(61.34,10.79) ; C47.1 v1(59.75,12.79) ; R6.2 v1(8.42,0.72) ; C43.2 C41.2 C42.2 31.97,1.87 31.9,1.8 v1(31.9,1.75) ; R13.2 33.43,9.78 33.1,10.11 33.1,11.05 v1(32.6,11.55) ; v1(48.98,12.89) 49.01,12.86 F2.4 ; L1.1 v1(11.05,0.23) ; R29.1 62.39,12.23 v1(62.79,11.84) ; R33.2 v1(59.94,3.66) ; C23.2 v1(36.04,7.87) ; 31.24,7.39 31.35,7.49 C40.2
  BOTTOM w0.102: 28.19,7.61 v1(28.23,7.58) ; v1(27.5,9.16) 27.9,9.16 28.19,9.45 U6.3 ; v1(18.55,8.85) 18.71,8.69 C9.2 ; v1(14.66,11.45) 14.68,11.47 C10.2 ; v1(15.95,4.3) 15.93,4.28 C11.2 ; C46.2 14.85,9.94 v1(14.66,10.13) ; v1(14.68,5.74) 14.74,5.8 C13.2 ; v1(11.41,8.85) 11.52,8.74 C12.2 ; 25.65,2.13 25.65,2.51 25.96,2.82 26.59,2.82 26.92,2.49 26.92,2.13 ; C14.2 v1(17.18,7.57)
  BOTTOM w0.203: v1(48.11,14.4) 48.33,14.18 U11.2 ; v1(36.04,7.87) 36.04,8.51 35.6,8.95 L3.2 ; U2.13 26.31,14.59 26.85,14.05 26.85,12.55 26.59,12.29 v1(26.59,11.86) 26.12,12.33 U2.8 25.11,12.33 24.97,12.19 C16.2 ; v1(45.49,11.81) 45.72,12.04 C60.2 ; v1(33.48,0.25) 33.48,0.65 R2.1 ; v1(8.87,12.87) 8.45,12.45 R26.2 ; C59.2 49.91,13.89 v1(49.53,14.27) ; 24.65,0.28 v1(24.6,0.23) R28.1 ; U7.29 v1(70.45,13.27) ; U11.8 v1(48.98,12.89) ; R1.1 35.85,0.55 35.61,0.3 v1(35.61,0.29) ; 26.92,2.13 U6.7 ; D2.2 v1(48.72,2.03) ; C17.1 31.14,14.73 v1(30.61,14.2) ; 25.65,2.13 U6.8 25.65,1.73 26.04,1.35 26.05,1.35 C39.2 v1(26.5,0.23) ; v1(47.68,13) U11.6
3V: length 11.9
  BOTTOM w0.203: v1(52.93,5.03) 53.05,5.14 C63.2 ; C65.2 v1(47.46,4.1) ; v1(45.34,2.03) D2.1 ; U10.12 v1(47.99,4.73) ; U10.20 v1(45.09,9.55) 45.09,9 44.82,8.74 44.4,8.74 44.17,8.51 C62.2 ; U10.27 v1(49.94,11.81) ; C61.2 46.69,4.15 v1(46.69,4.67) U10.14 ; C66.2 44.12,5.83 44.87,5.83 v1(45.11,6.07) 45.34,6.3 U10.15 ; U10.5 v1(52.19,7.6) ; v1(48.74,4.1) C64.2 49.29,4.21 U10.10
5V: length 68.1
  TOP w0.203: U3.39 v1(40.26,7.04) 40.26,6.84 39.95,6.53 39.95,5.79 40.32,5.42 C20.2 R11.2 ; U3.5 42.31,10.09 v1(42.32,10.08) 42.34,10.08 43.14,10.88 C28.2
  SIG1 w0.203: v1(3.35,6.78) 3.15,6.99 v1(3.15,13.16) 5.38,15.39 39.98,15.39 41.27,14.1 41.27,10.54 41.73,10.08 v1(42.32,10.08)
  BOTTOM w0.203: C21.2 42.56,10.08 v1(42.32,10.08) 41.92,10.08 41.4,9.57 41.4,8.18 v1(40.26,7.04) ; v1(3.15,13.16) 3.18,13.12 F1.1 ; v1(3.35,6.78) 3.23,6.91 3.23,7.8 3.55,8.12 F1.11
GND: length 200.8
  TOP w0.102: U1.H10 v1(16.6,7.55) ; v1(24.19,9.89) U5.J1 ; U1.M8 v1(14.66,4.95) ; U1.G10 v1(16.6,8.85) ; U1.M1 9.78,5.27 v1(9.72,5.34) ; U5.A1 30.25,9.74 30.25,9.74 v1(30.25,10.24) ; U1.G6 v1(13.36,8.85) ; U1.H6 v1(13.36,7.55) ; U1.F8 v1(14.66,9.5) ; U1.D8 v1(14.66,10.8) ; U1.G12 v1(17.9,8.85) ; U1.K6 v1(13.36,6.25) ; U1.D9 v1(15.95,10.8) ; U1.H9 v1(15.95,7.55) ; U1.G9 v1(15.95,8.85) ; U1.M9 v1(15.95,4.95) ; U1.J10 v1(16.6,6.9) ; U1.F2 v1(10.76,9.5) ; U1.H12 v1(17.9,7.55) ; U1.H7 v1(14.01,7.55) ; U1.D5 v1(12.71,10.8) ; U1.G8 v1(14.66,8.85) ; U1.G7 v1(14.01,8.85) ; U5.B7 v1(29.83,5.12) ; U1.F10 v1(16.6,9.5) ; U1.F9 v1(15.95,9.5) ; U5.C3 v1(29.03,7.58) ; U5.E3 v1(27.43,7.58) ; v1(9.83,4.62) 9.83,4.62 U1.N1 ; U1.F6 v1(13.36,9.5) ; U1.D7 v1(14.01,10.8) ; U1.K9 v1(15.95,6.25) ; U1.H8 v1(14.66,7.55) ; U1.K7 v1(14.01,6.25) ; U1.J8 v1(14.66,6.9) ; U1.J9 v1(15.95,6.9) ; U1.J6 v1(13.36,6.9) ; U1.K10 v1(16.6,6.25) ; U1.G2 v1(10.76,8.85) ; U1.F12 v1(17.9,9.5) ; U1.J7 v1(14.01,6.9) ; U1.F7 v1(14.01,9.5) ; U5.D7 v1(28.23,5.12) ; U5.A3 v1(30.63,7.58) ; U1.K8 v1(14.66,6.25)
  TOP w0.203: U9.3 67.26,9.64 ; U9.3 67.26,8.39 ; U9.3 v1(66.12,9.02) ; U9.3 67.89,9.02 ; U9.2 67.89,7.32 ; U9.2 v1(66.22,7.32) ; U9.2 67.26,7.94 ; U9.2 67.26,6.69 ; R23.2 R22.1 ; R23.2 39.94,15.21 38.99,15.21 38.61,14.83 C25.1 R16.2 ; R23.2 40.39,14.41 ; R23.2 40.39,15.14 ; R22.1 41.27,14.41 ; R22.1 41.52,14.77 41.92,15.18 C30.1 43.37,15.18 v1(43.41,15.14) ; R22.1 41.27,15.14 ; C43.1 C41.1 C42.1 32.8,2.15 v1(32.38,1.73) ; F2.5 44.8,13.8 v1(44.7,13.89) ; R19.1 C35.2 ; R19.1 44.35,10.03 ; R19.1 43.62,10.03 ; R19.1 C28.1 ; C35.2 44.35,9.14 ; C35.2 R12.2 v1(44.63,8.26) ; C35.2 43.62,9.14 ; C56.2 67.81,10.63 ; C56.2 67.31,10.99 ; C56.2 66.81,10.63 ; C56.2 v1(67.31,10.03) ; 37.21,4.5 C22.2 ; C22.2 v1(37.21,5.42) C33.1 C34.2 ; C22.2 36.56,4.89 ; C22.2 37.86,4.89 ; U8.10 61.34,7.88 U8.17 ; C57.2 62.73,4.28 ; C57.2 v1(62.23,3.61) ; C57.2 62.23,4.64 ; C57.2 61.73,4.28 ; C37.1 42.92,5.42 ; C37.1 42.42,4.93 v1(43.28,4.06) ; C37.1 42.42,5.79 ; J1.5 42.21,3.6 v1(42.21,3.6) ; v1(49.5,15.01) 50.11,15.01 50.71,14.42 F2.6 49.87,13.8 v1(49.33,13.26) ; v1(33.32,9.17) 33.6,8.89 R14.2 34,7.9 C23.1 ; C55.2 v1(67.49,5.33) ; C55.2 68.16,4.84 ; C55.2 68.16,5.83 ; C55.2 68.53,5.33 ; C36.2 35.61,6.85 U4.4 34.28,6.85 33.66,6.22 ; 68.08,11.47 R32.2 ; R32.2 v1(69.19,11.47) ; R32.2 68.58,11.1 ; C2.1 v1(11.94,0.2) ; C34.2 39.74,5.42 ; C34.2 39.24,5.06 ; R34.2 61.09,4.64 ; R34.2 61.58,4.28 ; R34.2 v1(61.09,3.63) ; R34.2 60.59,4.28 ; 55.78,2.55 J4.3 ; J4.3 57.04,2.55 ; J4.3 56.41,1.37 ; J4.3 56.41,3.09 57.02,3.71 v1(57.61,3.71) ; C23.1 34.36,7.87 ; C23.1 33.58,7.87 ; C38.1 v1(45.03,11.81) ; C38.1 C28.1 ; C38.1 R20.2 ; U4.1 35.23,5.35 ; U4.1 34.28,5.35 33.66,5.97 U4.9 ; U4.1 34.65,5.02 ; R4.1 v1(13.72,0.2) ; 33.66,6.22 U4.9 ; 33.66,6.22 33.66,6.64 C40.1 ; U4.9 33.4,6.35 U4.6 ; v1(49.38,8.2) 49.24,8.34 R9.2 ; C1.1 v1(12.83,0.2) ; C28.1 44.35,10.92 ; C28.1 43.62,10.92 ; U3.41 38.86,12.09 ; U3.41 38.86,8.48 ; U3.41 37.86,9.29 U3.28 ; R20.2 44.35,12.7 ; R20.2 43.62,12.7 ; R20.2 43.98,13.2 ; C47.2 v1(61.15,12.84) ; C47.2 61.15,11.16 ; C47.2 60.76,11.81 ; C47.2 61.54,11.81 ; 43.93,3.76 J6.1 44.91,4.74 ; v1(44.04,2.11) J1.9 J1.8 ; F2.2 48.01,12.45 48.16,12.6 48.16,13.13 v1(48.18,13.16) ; R16.2 37.33,15.16 34.95,15.16 v1(34.76,14.97) ; R16.2 37.72,14.41 ; R16.2 37.72,15.14 ; 64.64,7.42 C49.1 ; C49.1 v1(65.52,7.81) ; C49.1 64.64,8.2 ; v1(35.74,10.26) 35.53,10.26 34.99,10.81 C27.1 ; R7.1 v1(10.16,0.2) ; J1.6 J1.7 39.19,1.42 39.52,1.75 v1(39.52,1.9) ; v1(11.18,13.84) 11.18,14.1 11.72,14.64 R3.1 ; C24.2 33.59,12.46 v1(34.47,13.34) ; U8.15 v1(60.84,10.82)
  GND w0.203: J6.1 45.89,3.76 ; J6.1 43.93,3.76 ; J6.1 44.91,4.74 ; J6.1 44.91,2.78
  BOTTOM w0.102: v1(13.36,8.85) 12.77,8.26 C12.1 ; C46.1 15.05,9.11 v1(14.66,9.5) ; C13.1 15.56,6.64 v1(15.95,6.25) ; 28.81,10.54 28.81,10.52 U6.4 29.99,9.87 30.25,10.13 v1(30.25,10.24) ; 9.69,8.85 v1(10.76,8.85) ; v1(15.95,10.8) 15.79,10.63 C10.1 ; C14.1 16.34,8.59 v1(16.6,8.85) ; C7.1 17.74,9.66 v1(17.9,9.5) ; C8.1 16.72,6.13 v1(16.6,6.25) ; 9.69,5.37 v1(9.72,5.34) ; C11.1 15.79,5.12 v1(15.95,4.95) ; C9.1 17.87,8.81 v1(17.9,8.85)
  BOTTOM w0.203: 43.51,8.51 C62.1 43.14,8.01 ; v1(29.92,14.83) 29.51,14.83 29.31,15.03 U2.18 ; U2.9 26.1,12.83 26.39,13.11 26.39,13.52 26.07,13.83 U2.11 25.61,13.83 23.26,13.83 ; U10.28 v1(50.59,11.81) ; U10.1 50.59,10.21 U10.29 ; 42.9,6.73 C58.2 ; C58.2 43.27,7.23 ; C58.2 C66.1 ; C58.2 43.63,6.73 ; 23.26,13.83 23.71,13.38 C18.1 C16.1 ; 23.26,13.83 22.78,14.31 v1(22.78,14.86) ; 44,10.92 C29.2 ; C29.2 44.78,10.92 ; C29.2 44.39,10.29 ; 44.39,10.29 44.92,10.29 v1(44.94,10.3) 45.04,10.21 U10.21 ; 44.39,10.29 C21.1 ; O1.2 7.58,8.14 C4.2 7.37,8.89 v1(7.09,9.17) ; U10.17 v1(45.02,7.6) ; C15.2 33.22,13.46 v1(33.35,13.59) ; C61.1 v1(46.09,3.26) ; v1(39.22,2.44) 40.13,3.35 C31.2 ; U10.22 46.69,10.21 U10.29 ; F1.2 v1(2.67,12.62) ; F1.24 v1(4.93,0.92) ; v1(33.38,14.73) C17.2 ; 38,4.89 v1(38,4.19) ; 38,4.89 C19.2 ; 38,4.89 C32.2 ; C5.1 9.36,8.81 9.66,8.81 9.69,8.85 ; C39.1 v1(27.34,0.23) ; C19.2 38.61,5.28 ; C19.2 38.61,4.5 ; v1(7.26,2.11) 7.26,2.69 6.83,3.12 F1.21 ; 43.27,5.34 C66.1 ; C66.1 42.9,5.84 ; C66.1 43.63,5.84 ; U10.29 47.34,6.96 U10.13 ; U10.29 U10.11 ; C63.1 53.89,5.27 v1(53.67,5.05) ; U11.7 48.33,12.84 48.18,12.99 v1(48.18,13.16) ; U11.5 v1(47.03,12.91) ; C60.1 44.97,13.63 v1(44.7,13.89) ; U7.32 v1(73.75,13.24) ; 44.91,4.74 J6.1 43.93,3.76 ; C32.2 37.34,5.28 ; C32.2 36.69,4.89 ; C32.2 37.34,4.5 ; C65.1 v1(47.51,3.26) ; U2.1 28.81,10.54 ; U11.1 48.98,13.6 v1(49.33,13.26) 49.8,12.79 C59.1 ; F1.23 v1(0.96,14.82) ; 9.69,5.37 9.47,5.59 C3.2 8.55,6.08 8.94,6.48 O1.4 ; C6.2 9.27,11.48 8.94,11.81 8.94,12.29 v1(9.22,12.57) ; C64.1 v1(48.78,3.26)
  vias: v1(33.44,6.61) v1(33.44,6.1) v1(33.44,5.59) v1(33.87,6.61) v1(33.87,6.1) v1(33.87,5.59) v1(35.38,5.13) v1(36.42,13.28) v1(37.27,11.55) v1(37.27,10.92) v1(37.27,10.28) v1(37.27,9.65) v1(37.27,9.01) v1(37.9,11.55) v1(37.9,10.92) v1(37.9,10.28) v1(37.9,9.65) v1(37.9,9.01) v1(38.54,11.55) v1(38.54,10.92) v1(38.54,10.28) v1(38.54,9.65) v1(38.54,9.01) v1(39.17,11.55) v1(39.17,10.92) v1(39.17,10.28) v1(39.17,9.65) v1(39.17,9.01) v1(39.81,11.55) v1(39.81,10.92) v1(39.81,10.28) v1(39.81,9.65) v1(39.81,9.01) v1(40.44,11.55) v1(40.44,10.92) v1(40.44,10.28) v1(40.44,9.65) v1(40.44,9.01) v1(41.71,7.9) v1(42.21,7.06) v1(44.35,15.04) v1(47.29,7.68) v1(47.29,7.17) v1(47.8,7.68) v1(47.8,7.17) v1(48.31,7.68) v1(48.31,7.17) v1(48.82,7.68) v1(48.82,7.17) v1(49.38,9.22) v1(49.38,8.71) v1(49.38,7.7) v1(49.38,7.19) v1(49.89,9.22) v1(49.89,8.71) v1(49.89,8.2) v1(49.89,7.7) v1(49.89,7.19) v1(55.12,9.45) v1(55.14,8.1) v1(55.14,6.27) v1(55.14,0.69) v1(55.22,10.54) v1(55.19,3.28) v1(55.27,5.26) v1(55.45,13.67) v1(55.47,14.63) v1(55.78,0.71) v1(57.07,11.51) v1(57.23,5.26) v1(57.58,13.34) v1(58.9,3.61) v1(60.57,8.61) v1(60.57,8.1) v1(60.57,7.59) v1(61.08,8.61) v1(61.08,8.1) v1(61.08,7.59) v1(61.59,8.61) v1(61.59,8.1) v1(61.59,7.59) v1(63.12,5.56) v1(63.35,3.45) v1(64.01,9.96) v1(64.54,10.46) v1(65.38,3.28) v1(65.51,5.38) v1(66.57,13.26) v1(67.41,4.37) v1(67.36,3.05) v1(68.63,8.2) v1(69.34,13.28) v1(69.67,4.11) v1(70.33,2.97) v1(71.04,5.84) v1(71.78,12.29) v1(72.11,8.66) v1(72.19,4.7) v1(72.34,10.54) v1(72.42,6.55) v1(72.57,2.92) v1(72.92,12.37) v1(73.69,11.3) v1(73.71,5.56) v1(73.79,8.1) v1(73.96,9.68) v1(74.04,3.05)
VBAT: length 11.5
  TOP w0.203: U4.2 35.77,5.85 ; 35.77,5.85 35.27,6.35 U4.3 ; 35.77,5.85 C36.1 J5.1 ; C33.2 38.26,6.35 38.26,6.98 ; 38.26,6.98 v1(38.26,6.99) U3.34 ; 38.26,6.98 37.86,7.38 U3.33
  BOTTOM w0.203: J5.1 35.81,5.82 36.73,6.73 38.01,6.73 v1(38.26,6.99)
VDDA: length 5.8
  TOP w0.102: C1.2 C2.2 L1.2 11.18,1.69 11.18,2.03 v1(11.33,2.18) ; v1(10.01,3.3) 10.03,3.32 U1.R1 ; U1.P1 10.12,3.97 v1(9.98,3.84)
  BOTTOM w0.102: v1(11.33,2.18) 11.13,2.18 v1(10.01,3.3) 9.98,3.33 v1(9.98,3.84)
BOOT0: length 4.2
  TOP w0.102: R3.2 12.06,13.42 v1(12.06,12.93) ; U1.D6 v1(13.36,10.8)
  BOTTOM w0.102: v1(13.36,10.8) 13.36,11.64 v1(12.06,12.93)
BOOT1: length 5.5
  TOP w0.102: R4.2 13.09,2.18 12.5,2.18 v1(12.32,2.36) ; U1.M6 v1(13.36,4.95)
  BOTTOM w0.102: v1(12.32,2.36) 12.32,4.4 12.54,4.63 13.03,4.63 v1(13.36,4.95)
BYPASS: length 8.4
  TOP w0.102: v1(12.08,5.65) 12.11,5.65 U1.L4 ; R7.2 9.72,2.01 8.39,2.01 v1(8.22,2.18)
  BOTTOM w0.102: v1(12.08,5.65) 11.73,5.3 11.73,4.79 11.16,4.22 9.86,4.22 8.22,2.57 v1(8.22,2.18)
FMC_A0: length 29
  TOP w0.102: U1.E2 10.76,10.15 v1(10.76,10.15) ; U5.H7 v1(25.03,5.12)
  SIG2 w0.102: v1(10.76,10.15) 10.76,10.22 10.1,10.87 9.78,10.87 9.53,11.13 9.53,12.01 10.98,13.47 11.99,13.47 13.59,15.06 21.31,15.06 22.35,14.02 22.35,11.43 23.5,10.29 23.5,8.2 23.06,7.77 23.06,6.1 23.7,5.46 24.69,5.46 v1(25.03,5.12)
FMC_A1: length 27
  TOP w0.102: U5.H8 v1(25.03,3.58) ; v1(11.43,7.59) 11.45,7.59 U1.H3
  SIG2 w0.102: v1(11.43,7.59) 11.09,7.26 10.16,7.26 8.31,5.4 8.31,3.53 10.85,0.99 19.96,0.99 20.52,0.43 v1(20.84,0.43)
  BOTTOM w0.102: v1(20.84,0.43) 21.35,0.43 21.56,0.22 22.03,0.22 22.38,0.57 22.38,1.12 23.22,1.96 24,1.96 24.66,2.62 24.66,3.21 v1(25.03,3.58)
FMC_A2: length 25.9
  TOP w0.102: U1.H2 10.82,7.61 v1(10.77,7.61) ; U5.J8 v1(24.23,3.58)
  SIG2 w0.102: v1(19.81,0.64) 19.66,0.79 10.76,0.79 8.08,3.47 8.08,5.46 10.23,7.61 v1(10.77,7.61)
  BOTTOM w0.102: v1(19.81,0.64) 20.53,0.64 20.68,0.78 20.98,0.78 21.05,0.71 21.36,0.71 21.65,0.42 21.94,0.42 22.15,0.63 22.15,1.27 24.23,3.35 v1(24.23,3.58)
FMC_A3: length 25
  TOP w0.102: U1.J2 10.74,6.89 v1(10.74,6.88) ; v1(24.22,5.11) 24.21,5.11 U5.J7
  SIG2 w0.102: v1(20.43,1.05) 20.26,1.22 10.91,1.22 8.51,3.62 8.51,5.32 10.07,6.88 v1(10.74,6.88)
  BOTTOM w0.102: v1(20.43,1.05) 20.99,1.05 21.13,0.91 21.43,0.91 21.64,1.12 21.64,1.33 23.47,3.17 23.47,4.35 v1(24.22,5.11)
FMC_A4: length 31.4
  TOP w0.102: v1(24.2,8.3) U5.J3 ; v1(11.4,6.86) 11.4,6.9 U1.J3
  SIG2 w0.102: v1(25.13,4.34) 25.45,4.66 25.45,5.2 24.86,5.79 23.88,5.79 23.32,6.35 23.32,7.42 v1(24.2,8.3) ; v1(21.79,0.78) 21.21,0.78 20.56,1.42 10.99,1.42 8.71,3.7 8.71,5.18 10.06,6.53 11.07,6.53 v1(11.4,6.86)
  BOTTOM w0.102: v1(25.13,4.34) 24.48,4.34 23.8,3.66 23.8,3.21 21.95,1.35 21.95,0.93 v1(21.79,0.78)
FMC_A5: length 29.7
  TOP w0.102: v1(11.38,6.23) U1.K3 ; U5.J2 v1(24.23,9.12)
  SIG2 w0.102: 25.53,6.07 v1(25.5,6.07) 25.4,6.17 25.4,7.95 v1(24.23,9.12) ; v1(11.38,6.23) 10.05,6.23 8.92,5.1 8.92,3.78 11.07,1.63 20.93,1.63 v1(21.28,1.27)
  BOTTOM w0.102: v1(25.5,6.07) 24.91,5.48 23.49,5.48 22.91,4.9 22.91,3.71 22.25,3.05 22.25,2.24 v1(21.28,1.27)
FMC_A6: length 19.3
  TOP w0.102: U5.H3 v1(25.03,7.58) ; v1(12.94,2.74) 13.36,3.16 13.36,3.65 U1.P6
  SIG2 w0.102: v1(25.03,7.58) 25.1,7.51 25.1,6.17 v1(25.03,6.11)
  BOTTOM w0.102: v1(12.94,2.74) 12.94,2.37 13.79,1.52 20.96,1.52 22.05,2.61 22.05,3.14 22.68,3.77 22.68,4.98 23.43,5.73 24.65,5.73 v1(25.03,6.11)
FMC_A7: length 22
  TOP w0.102: v1(26.19,6.78) 25.2,6.78 24.66,6.24 v1(24.54,6.24) ; U5.H2 v1(25.03,9.12) ; v1(13.36,4.3) U1.N6
  SIG2 w0.102: v1(26.19,6.78) 26.19,7.96 v1(25.03,9.12)
  BOTTOM w0.102: v1(24.54,6.24) 24.22,5.93 23.35,5.93 22.48,5.06 22.48,3.85 21.84,3.22 21.84,2.7 20.95,1.8 13.87,1.8 13.32,2.35 13.32,4.27 v1(13.36,4.3) 13.34,4.3
FMC_A8: length 19
  TOP w0.102: U1.R7 14.33,2.69 14.51,2.51 v1(14.51,2.49) ; v1(23.76,6.63) 23.68,6.63 23.29,7.01 23.29,9.88 23.7,10.29 24.59,10.29 v1(25.03,9.86) 24.96,9.86 U5.H1
  BOTTOM w0.102: v1(14.51,2.49) 14.58,2.41 20.98,2.41 21.44,2.87 21.44,3.39 22.07,4.02 22.07,5.23 23.47,6.63 v1(23.76,6.63)
FMC_A9: length 17.4
  TOP w0.102: v1(14.04,2.44) 14.04,2.89 14.01,2.92 14.01,3.65 U1.P7 ; U5.G3 v1(25.83,7.58) 25.41,7.16 25.24,7.16 24.84,6.76 24.55,6.76 v1(24.07,6.28)
  BOTTOM w0.102: v1(14.04,2.44) 14.34,2.14 20.99,2.14 21.64,2.78 21.64,3.3 22.28,3.94 22.28,5.15 23.4,6.27 24.06,6.27 v1(24.07,6.28)
FMC_A10: length 14.2
  TOP w0.102: v1(20.88,3.1) 22.1,3.1 22.78,3.78 23.21,3.78 23.5,3.5 23.5,2.69 23.83,2.36 24.59,2.36 v1(25.03,2.79) 25.01,2.79 U5.H9 ; v1(14.07,4.32) 14.07,4.36 U1.N7
  BOTTOM w0.102: v1(14.07,4.32) 14.07,3.79 14.76,3.1 v1(20.88,3.1)
FMC_A11: length 20.2
  TOP w0.102: U1.M7 v1(14.01,4.95) ; v1(23.7,7.11) 23.75,7.16 v1(24.69,7.16) ; v1(25.87,9.08) 25.86,9.07 25.77,9.07 U5.G2
  BOTTOM w0.102: v1(24.69,7.16) 25.95,7.16 26.29,7.49 26.29,8.66 v1(25.87,9.08) ; v1(23.7,7.11) 23.67,7.11 21.87,5.31 21.87,4.14 21.23,3.51 21.23,2.95 20.9,2.62 14.88,2.62 13.71,3.79 13.71,4.66 v1(14.01,4.95)
FMC_A12: length 13
  TOP w0.102: U5.G1 25.45,10.29 26.01,10.85 26.01,11.15 25.45,11.71 23.11,11.71 22.48,11.07 22.48,8.74 21.77,8.03 20.93,8.03 20.4,7.51 20.4,6.33 20,5.92 U1.L15
FMC_D0: length 22.3
  TOP w0.102: U5.A8 v1(30.63,3.58) ; v1(20.97,7.26) 20.97,6.23 19.74,5 19.25,5 19.2,4.95 U1.M14
  SIG2 w0.102: v1(30.63,3.58) 31.01,3.19 31.01,2.24 30.7,1.92 30.7,1.92 29.44,0.66 23.55,0.66 22.59,1.62 22.08,1.62 21.36,2.33 21.36,3.84 21.83,4.3 21.83,5.46 20.97,6.31 v1(20.97,7.26)
FMC_D1: length 21
  TOP w0.102: v1(21.33,7.65) 20.86,7.65 20.62,7.41 20.62,6.16 20.05,5.6 19.2,5.6 U1.L14 ; U5.B9 30.05,2.55 v1(30.05,1.78)
  SIG2 w0.102: v1(30.05,1.78) 29.21,0.94 29.17,0.92 29.11,0.86 23.63,0.86 22.67,1.82 22.16,1.82 21.56,2.42 21.56,3.73 22.04,4.2 22.04,5.53 21.33,6.25 21.33,7.64 v1(21.33,7.65)
FMC_D2: length 24.1
  TOP w0.102: U5.B8 v1(29.83,3.58) ; U1.B12 v1(17.9,12.1)
  SIG2 w0.102: v1(17.9,12.1) 20.14,12.1 22.48,9.75 22.48,8.63 22,8.14 22,7.5 21.73,7.23 21.73,6.41 22.45,5.7 22.45,4.02 21.97,3.55 21.97,2.59 22.33,2.23 22.84,2.23 23.8,1.27 27.89,1.27 29.83,3.21 v1(29.83,3.58)
FMC_D3: length 23.1
  TOP w0.102: U1.C12 v1(17.9,11.45) ; U5.C9 29.03,2.78 29.03,1.87 v1(28.93,1.78)
  SIG2 w0.102: v1(28.93,1.78) 28.22,1.07 23.71,1.07 22.75,2.03 22.24,2.03 21.77,2.5 21.77,3.63 22.24,4.11 22.24,5.62 21.53,6.33 21.53,7.32 21.79,7.58 21.79,8.34 22.28,8.82 22.28,9.65 20.48,11.45 v1(17.9,11.45)
FMC_D4: length 16.9
  TOP w0.102: U5.C8 v1(29.03,3.58) ; v1(26.4,1.63) 26.07,1.3 23.36,1.3 22.84,1.83 16.33,1.83 14.98,3.18 U1.R8
  SIG2 w0.102: v1(29.03,3.58) 29.03,2.81 27.84,1.63 v1(26.4,1.63)
FMC_D5: length 18.4
  TOP w0.102: U5.D9 28.15,2.85 v1(28.22,2.85) 28.22,1.8 27.18,0.76 23.67,0.76 23.15,0.23 22.7,0.23 22.35,0.58 22.35,1.17 21.9,1.62 15.98,1.62 14.66,2.94 14.66,3.65 U1.P8
FMC_D6: length 16.6
  TOP w0.102: U5.D8 v1(28.23,3.58) ; U1.P9 15.95,3.65 15.95,2.78 16.5,2.23 22.02,2.23 v1(22.61,2.82)
  SIG2 w0.102: v1(22.61,2.82) 22.82,2.82 23.63,2.01 27.94,2.01 28.6,2.67 28.6,3.2 v1(28.23,3.58)
FMC_D7: length 14.6
  TOP w0.102: U1.R9 15.63,2.82 16.41,2.03 22.32,2.03 23.1,2.81 v1(23.1,3.4) ; U5.E9 27.41,2.79 v1(27.43,2.79)
  SIG2 w0.102: v1(23.1,3.4) 24.07,2.42 27.05,2.42 v1(27.43,2.79)
FMC_D8: length 22
  TOP w0.102: v1(21.01,9.04) 22.05,10.08 22.05,11.25 22.91,12.12 25.73,12.12 27.05,10.79 U5.E1 ; v1(21.13,4.24) 20.93,4.24 20.62,3.93 20.62,3.64 20.32,3.33 20.32,3.15 19.81,2.64 17.11,2.64 16.6,3.15 16.6,3.65 U1.P10
  SIG2 w0.102: v1(21.01,9.04) 21.01,8.4 20.17,7.56 20.17,5.83 20.9,5.1 20.9,4.47 v1(21.13,4.24)
FMC_D9: length 25.5
  TOP w0.102: v1(20.58,9.62) 20.72,9.62 20.9,9.8 21.16,9.8 21.53,10.18 21.53,11.33 22.75,12.55 27.03,12.55 28.24,11.33 28.24,9.09 28.19,9.09 U5.D2 ; U1.R10 16.28,2.83 16.67,2.44 19.9,2.44 20.52,3.06 20.52,3.25 20.98,3.7 v1(20.98,3.78)
  SIG2 w0.102: v1(20.98,3.78) 20.7,4.06 20.7,4.9 19.96,5.64 19.96,7.65 20.62,8.31 20.62,9.58 v1(20.58,9.62)
FMC_D10: length 22.9
  TOP w0.102: U1.N11 v1(17.25,4.3) ; v1(20.27,9.14) 20.6,9.14 20.88,9.42 21.07,9.42 21.77,10.13 21.77,11.28 22.84,12.34 25.72,12.34 25.75,12.32 26.72,12.32 27.85,11.18 U5.D1
  SIG2 w0.102: v1(17.25,4.3) 17.25,3.35 17.56,3.04 20.17,3.04 20.47,3.35 20.47,4.78 19.76,5.49 19.76,8.64 v1(20.27,9.14)
FMC_D11: length 25.9
  TOP w0.102: U5.C2 29.03,9.12 29.03,11.61 27.69,12.95 22.58,12.95 22.23,12.6 21.09,11.46 21.09,10.53 v1(20.97,10.41) ; U1.P11 17.3,3.6 17.3,3.21 17.47,3.05 19.64,3.05 19.91,3.32 19.91,3.5 20.22,3.8 20.22,4.33 20.97,5.08 v1(21.46,5.08)
  SIG2 w0.102: v1(20.97,10.41) 21.56,9.82 21.56,8.38 20.62,7.44 20.62,6.33 21.46,5.49 v1(21.46,5.08)
FMC_D12: length 24.7
  TOP w0.102: U1.R11 16.93,3.11 17.2,2.84 19.73,2.84 20.12,3.23 20.12,3.41 20.42,3.72 20.42,4.03 20.99,4.6 21.42,4.6 v1(21.44,4.58) ; U5.C1 28.65,11.48 27.38,12.75 22.67,12.75 22.43,12.51 21.33,11.41 21.33,10.26 21.12,10.05 20.68,10.05 v1(20.66,10.07)
  SIG2 w0.102: v1(20.66,10.07) 21.36,9.37 21.36,8.47 20.37,7.48 20.37,6.07 21.11,5.33 21.11,4.91 v1(21.44,4.58)
FMC_D13: length 17.8
  TOP w0.102: U1.P15 19.81,4.26 19.81,4.5 21.69,6.38 21.69,7.15 22.89,8.34 22.89,10.19 23.42,10.72 24.33,10.72 24.64,11.03 24.64,11.13 24.9,11.39 25.26,11.39 v1(25.65,11) ; U5.B2 v1(29.83,9.12)
  SIG2 w0.102: v1(25.65,11) 25.86,11.2 29.57,11.2 29.87,10.9 29.87,9.17 v1(29.83,9.12)
FMC_D14: length 16.8
  TOP w0.102: v1(25.08,11.04) 24.56,10.52 23.57,10.52 23.09,10.03 23.09,8.26 21.89,7.06 21.89,6.29 20.02,4.41 20.02,4.07 19.64,3.7 19.25,3.7 19.2,3.65 U1.P14 ; v1(29.45,10.67) U5.B1
  SIG2 w0.102: v1(29.45,10.67) 29.4,10.61 25.48,10.61 25.08,11.02 v1(25.08,11.04)
FMC_D15: length 18.4
  TOP w0.102: v1(23.32,11.35) 23.29,11.35 22.68,10.74 22.68,8.45 21.49,7.26 21.49,6.46 19.65,4.62 U1.N15 ; v1(30.56,9.11) 30.56,9.06 U5.A2
  SIG2 w0.102: v1(30.56,9.11) 30.84,9.39 30.84,10.52 29.86,11.49 23.46,11.49 v1(23.32,11.35)
HE_ADC: length 28.4
  TOP w0.102: U1.M3 11.39,4.94 v1(11.38,4.94)
  SIG1 w0.102: v1(11.38,4.94) 10.77,4.33 10.77,1.95 11.19,1.54 19.22,1.54 19.91,2.23 23.47,2.23 24.43,1.27 30.73,1.27 31.06,0.94 32.41,0.94 33.55,2.08 33.55,2.29 v1(33.68,2.41)
INL+: length 15
  TOP w0.305: v1(55.85,8.71) 56.63,8.71 56.71,8.64 C50.1
  BOTTOM w0.305: U7.25 66.05,13.63 65.73,13.31 65.73,12.65 62.76,9.68 56.7,9.68 56.18,9.15 56.18,9.04 v1(55.85,8.71)
INL-: length 14.8
  TOP w0.305: C48.1 56.71,9.65 56.53,9.47 v1(55.85,9.47)
  BOTTOM w0.305: U7.24 64.95,13.63 65.27,13.31 65.27,12.83 62.57,10.13 60.25,10.13 59.94,10.44 59.64,10.44 59.33,10.13 59.03,10.13 58.72,10.44 58.42,10.44 58.12,10.13 57.78,10.13 57.48,10.44 57.18,10.44 56.87,10.13 56.52,10.13 v1(55.85,9.47)
INR+: length 19
  TOP w0.305: C51.1 56.71,7.62 56.63,7.54 v1(55.88,7.54)
  BOTTOM w0.305: U7.26 67.15,13.63 67.47,13.31 67.47,12.23 67.25,12 66.83,12 66.61,11.79 66.61,11.36 66.4,11.14 65.97,11.14 65.75,10.92 65.75,10.49 65.39,10.13 64.96,10.13 64.74,9.92 64.74,9.49 64.53,9.27 64.1,9.27 63.88,9.06 63.88,8.63 61.99,6.73 56.69,6.73 v1(55.88,7.54)
INR-: length 18.7
  TOP w0.305: C52.1 56.71,6.6 56.53,6.78 v1(55.88,6.78)
  BOTTOM w0.305: U7.27 68.25,13.63 67.93,13.31 67.93,12.03 62.18,6.27 56.5,6.27 55.94,6.84 v1(55.88,6.78)
LCD_B0: length 14
  TOP w0.102: v1(4.19,6.35) 4.19,10.9 6.52,13.22 9.07,13.22 9.95,12.35 9.95,12.22 10.4,11.77 U1.B1
  BOTTOM w0.102: F1.15 4.42,6.12 v1(4.19,6.35)
LCD_B1: length 23.8
  TOP w0.102: v1(3.81,6.71) 3.99,6.88 3.99,7.95 2.74,9.19 2.74,11.08 6.72,15.06 14.15,15.06 14.94,14.27 14.94,13.03 14.68,12.78 14.68,12.07 U1.B8
  BOTTOM w0.102: F1.14 4.42,6.62 4.34,6.71 v1(3.81,6.71)
LCD_B2: length 25
  TOP w0.102: U1.B10 15.98,12.08 15.98,14 14.5,15.47 6.55,15.47 2.34,11.25 2.34,8.92 3.23,8.03 3.23,7.52 3.59,7.16 v1(3.63,7.16)
  BOTTOM w0.102: F1.13 3.67,7.12 v1(3.63,7.16)
LCD_B3: length 23.6
  TOP w0.102: v1(3.63,7.62) 3.63,7.98 2.54,9.07 2.54,11.17 6.64,15.27 14.36,15.27 15.34,14.28 15.34,12.06 U1.B9
  BOTTOM w0.102: v1(3.63,7.62) 5.66,7.62 F1.12
LCD_B4: length 17.6
  TOP w0.102: v1(3.81,8.64) 3.75,8.64 2.97,9.42 2.97,11 6.07,14.1 10.13,14.1 v1(11.13,13.11) ; U1.D4 v1(12.06,10.8)
  BOTTOM w0.102: v1(11.13,13.11) 11.13,12.12 12.06,11.18 v1(12.06,10.8) 12.04,10.8 ; F1.10 5.65,8.64 v1(3.81,8.64)
LCD_B5: length 15.8
  TOP w0.102: U1.C4 12.06,11.45 12.06,11.84 11.76,12.14 11.62,12.14 11.37,12.39 11.37,12.52 11.15,12.75 10.92,12.75 9.78,13.89 6.2,13.89 3.17,10.87 3.17,9.68 3.76,9.09 v1(3.81,9.09)
  BOTTOM w0.102: F1.9 5.63,9.09 v1(3.81,9.09)
LCD_B6: length 14.1
  TOP w0.102: U1.C3 11.41,11.45 11.41,11.84 11.11,12.14 10.97,12.14 10.74,12.37 10.74,12.5 9.61,13.64 6.27,13.64 3.43,10.79 3.43,9.93 v1(3.78,9.58)
  BOTTOM w0.102: v1(3.78,9.58) 5.61,9.58 F1.8
LCD_B7: length 12.3
  TOP w0.102: v1(3.81,10.11) 3.81,10.85 6.39,13.43 9.26,13.43 10.15,12.54 10.15,12.31 10.32,12.15 10.45,12.15 10.76,11.84 10.76,11.45 U1.C2
  BOTTOM w0.102: F1.7 5.65,10.11 v1(3.81,10.11)
LED-: length 9.2
  BOTTOM w0.203: U10.25 48.64,11.63 48.92,11.91 ; U10.26 49.29,11.75 49.46,11.91 ; 48.92,11.91 49.46,11.91 ; 48.92,11.91 48.34,11.91 47.99,11.57 U10.24 ; 49.46,11.91 49.79,12.24 51.08,12.24 52.32,11 52.32,10.07 51.81,9.55 U10.2
MIC_BIAS: length 16
  TOP w0.254: C55.1 69,6.59 U9.1 70.74,8.33 70.74,11.85 70.09,12.5 64.74,12.5 v1(63.85,13.39)
  BOTTOM w0.254: U7.23 v1(63.85,13.39)
MICN: length 7.7
  TOP w0.254: v1(61.65,13.31) 62.31,12.65 62.66,12.65 63.84,11.47 C56.1
  BOTTOM w0.254: U7.21 61.65,14.62 v1(61.65,13.31)
MICP: length 9.1
  TOP w0.254: v1(62.75,13.45) 64.19,12.01 69.3,12.01 C54.1
  BOTTOM w0.254: U7.22 v1(62.75,13.45)
OSC32-IN: length 3.3
  TOP w0.102: U1.E1 v1(9.98,9.82)
  BOTTOM w0.102: O2.2 8,11.13 8.88,10.25 C6.1 9.55,10.25 v1(9.98,9.82)
OSC32-OUT: length 2.7
  TOP w0.102: U1.F1 10.01,9.17 v1(9.98,9.2)
  BOTTOM w0.102: O2.1 8.64,9.86 8.93,9.56 C5.2 9.59,9.56 9.95,9.2 v1(9.98,9.2)
OSC-IN: length 3
  TOP w0.102: U1.G1 10,8.52 v1(9.97,8.49)
  BOTTOM w0.102: v1(9.97,8.49) 9.97,8.48 9.39,7.9 O1.3 8.42,8.43 C4.1
OSC-OUT: length 4.4
  TOP w0.102: U1.H1 10.36,7.87 10.32,7.91 10.03,7.91 10,7.87 9.94,7.87 9.94,7.92 v1(9.91,7.92)
  BOTTOM w0.102: C3.1 7.71,6.47 O1.1 8.48,7.24 9.4,7.24 9.91,7.75 v1(9.91,7.92)
OUTL: length 6.4
  TOP w0.305: R31.1 57.89,12.57 60.34,10.12 U8.16
OUTR: length 12.5
  TOP w0.305: R30.1 50.68,3.01 51.94,4.27 57.78,4.27 59.23,5.71 59.59,5.71 60.34,6.46 U8.5
PDR_ON: length 3.4
  TOP w0.102: U1.C6 13.39,11.42 13.39,11.81 13.11,12.09 12.97,12.09 12.75,12.31 12.75,12.78 12.78,12.8 12.78,13.25 R5.2
RESET: length 11.4
  TOP w0.102: v1(8.58,1.41) 8.73,1.56 R6.1 ; U1.J1 8.02,7.22 7.33,7.91 v1(7.16,7.91)
  SIG2 w0.102: v1(8.58,1.41) 8.58,1.58 8.57,1.59 8.57,2.6 7.82,3.35 7.82,7.29 7.2,7.91 v1(7.16,7.91)
SYS: length 11.5
  TOP w0.203: v1(42.04,11.81) 41.91,11.69 U3.9 ; U3.32 37.46,7.16 v1(37.46,7.16) 37.21,6.91 C22.1 ; U3.36 39.06,7.3 39.06,7.29 39.06,7.18 38.86,6.99 ; 38.86,6.99 v1(38.86,6.99) ; 38.86,6.99 38.66,7.19 U3.35 ; C24.1 35.42,12.19 v1(35.69,11.93) 35.93,11.69 U3.22 ; U3.24 35.91,10.89 35.81,10.79 v1(35.73,10.79)
  BOTTOM w0.203: v1(38.86,6.99) 38.61,6.73 C19.1 C32.1 ; L2.2 41.78,4.72 v1(42.55,3.96) ; C29.1 42.37,10.92 42.04,11.25 v1(42.04,11.81)
VCAP_1: length 1.3
  TOP w0.102: U1.M10 v1(16.6,4.95)
  BOTTOM w0.102: C8.2 16.94,5.3 v1(16.6,4.95)
VCAP_2: length 1.1
  TOP w0.102: U1.F13 v1(18.55,9.5)
  BOTTOM w0.102: C7.2 18.55,10.13 v1(18.55,9.5)
VCHG: length 7.3
  TOP w0.203: v1(38.7,2.61) 38.7,2.66 39.09,3.04 J1.1 ; U3.37 v1(39.46,7.12)
  BOTTOM w0.203: v1(38.7,2.61) 39.37,3.28 39.37,5.59 39.94,6.16 C31.1 40.13,6.45 v1(39.46,7.12)
VRTC: length 40.4
  TOP w0.102: U3.38 39.86,6.88 C34.1 38.82,5.84 36.75,5.84 36.45,6.15 36.45,6.73 35.99,7.19 33.75,7.19 33.15,7.79 33.15,8.64 32.82,8.97 32.82,10.69 32.44,11.07 32.2,11.07 28.7,14.58 25.43,14.58 v1(25.17,14.83) ; v1(9.88,11.79) 9.93,11.79 10.43,11.29 U1.C1
  BOTTOM w0.102: v1(9.88,11.79) 9.86,11.81 9.86,13.36 11.71,15.21 24.79,15.21 v1(25.17,14.83)
N58225: length 4.6
  TOP w0.203: R27.1 7.14,3.56 v1(7.19,3.61)
  BOTTOM w0.203: F1.20 7.17,3.62 v1(7.19,3.61)
N76608: length 1.1
  BOTTOM w0.102: R10.1 24.56,14.34 25.6,14.34 U2.12
N76702: length 1.2
  BOTTOM w0.102: U2.10 25.14,13.33 24.89,13.08 C18.2
N76822: length 2.1
  BOTTOM w0.102: C15.1 30.38,13.46 30.01,13.83 U2.20
